# Altium PCB tach key f.PcbDoc
Units mm, origin at the board's own origin, x right, y up, seen from the top; angles counter-clockwise.
Board outline 264.23 x 348.68 mm, 2 copper layers (Top Layer, Bottom Layer); 80 components, 53 nets, 230 pads, 0 vias.
Unrouted connection lines stored in the file: 14.
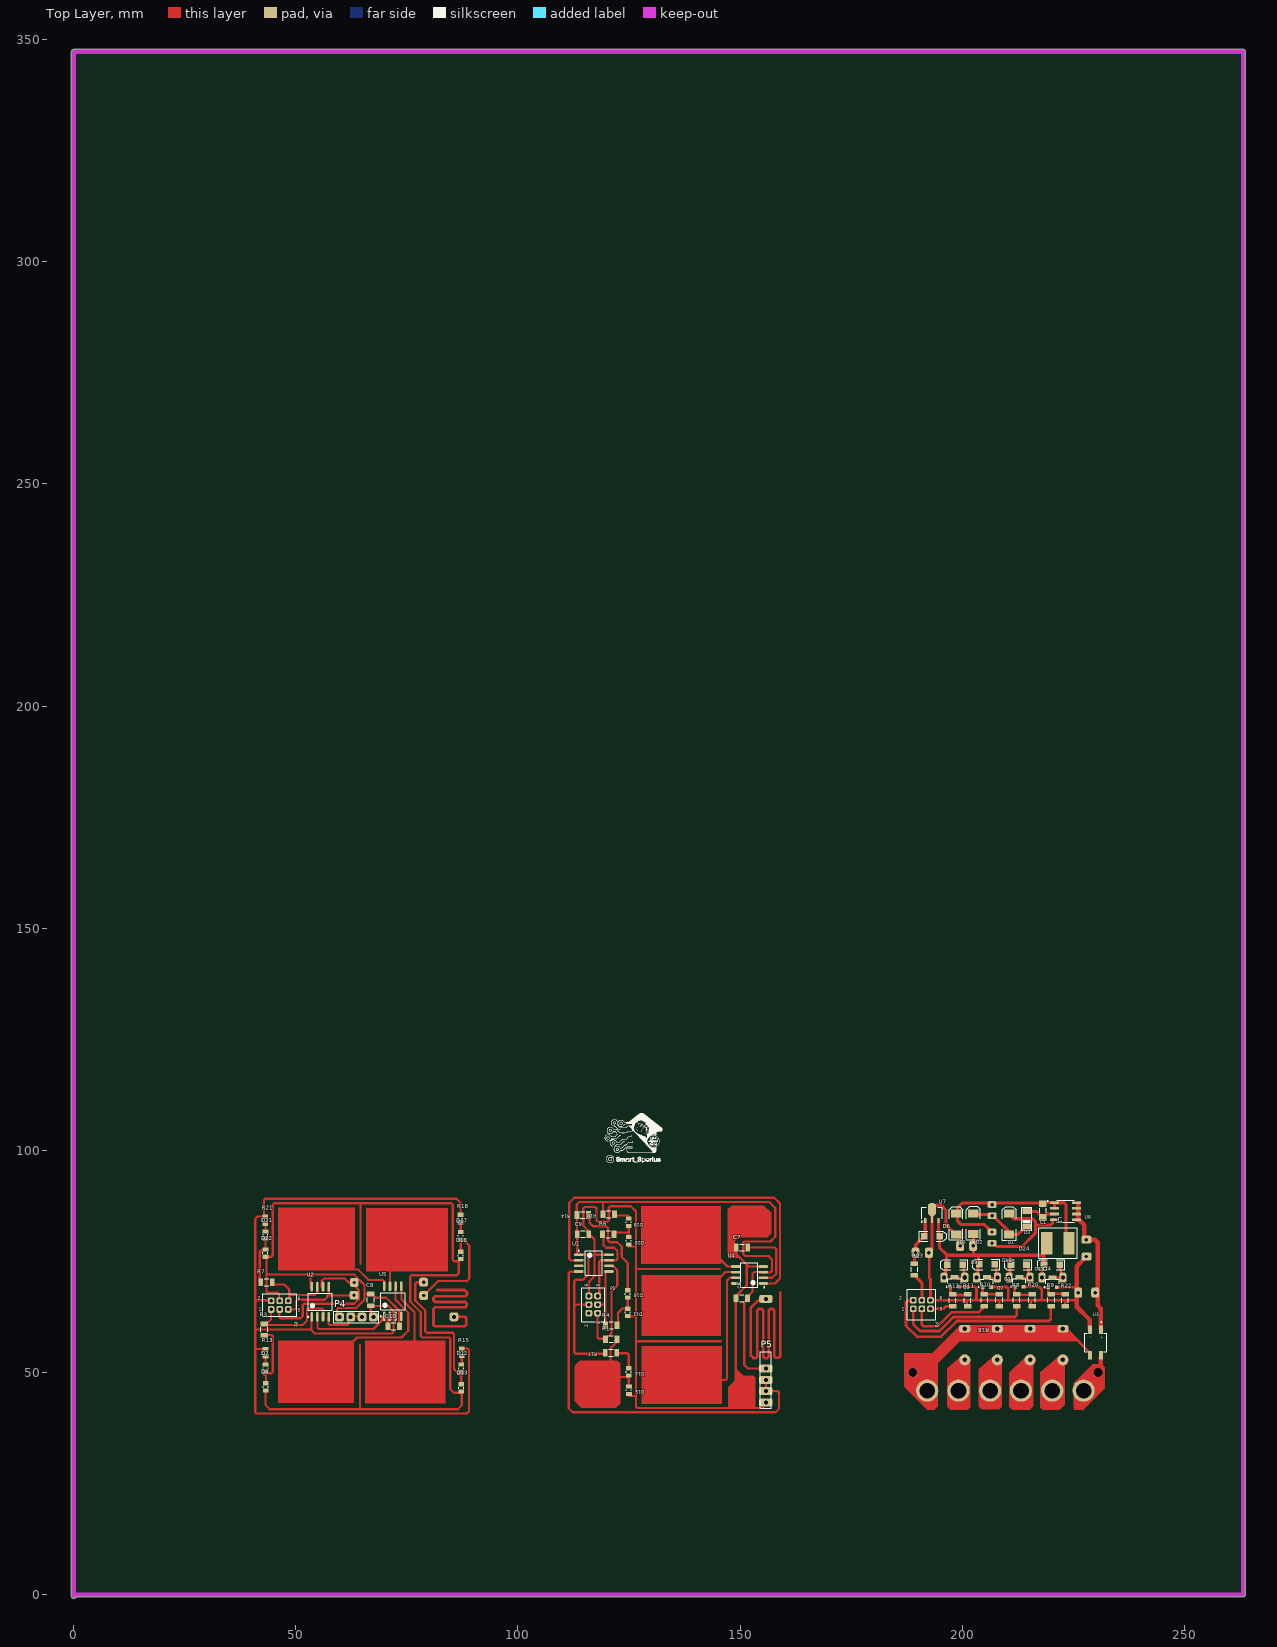
[diagram p0: Top Layer view]
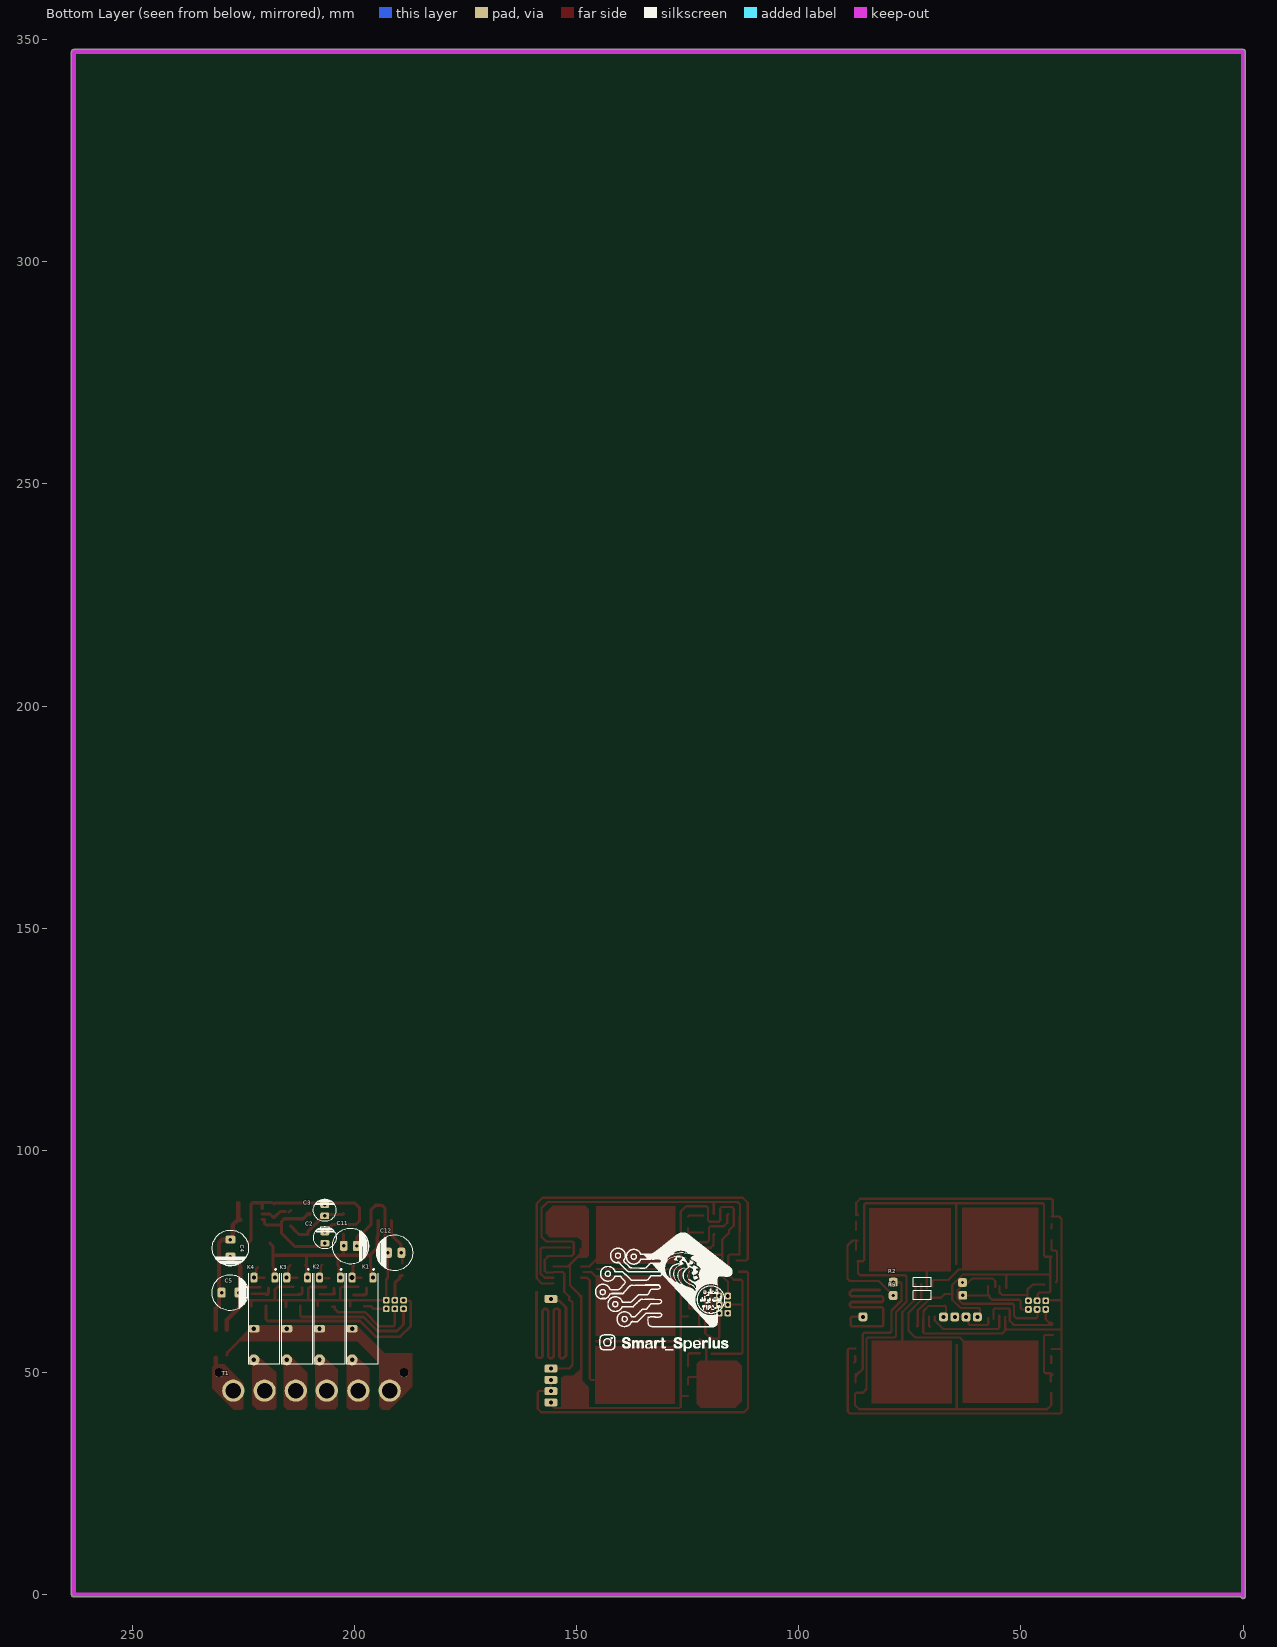
[diagram p1: Bottom Layer view, seen from below]
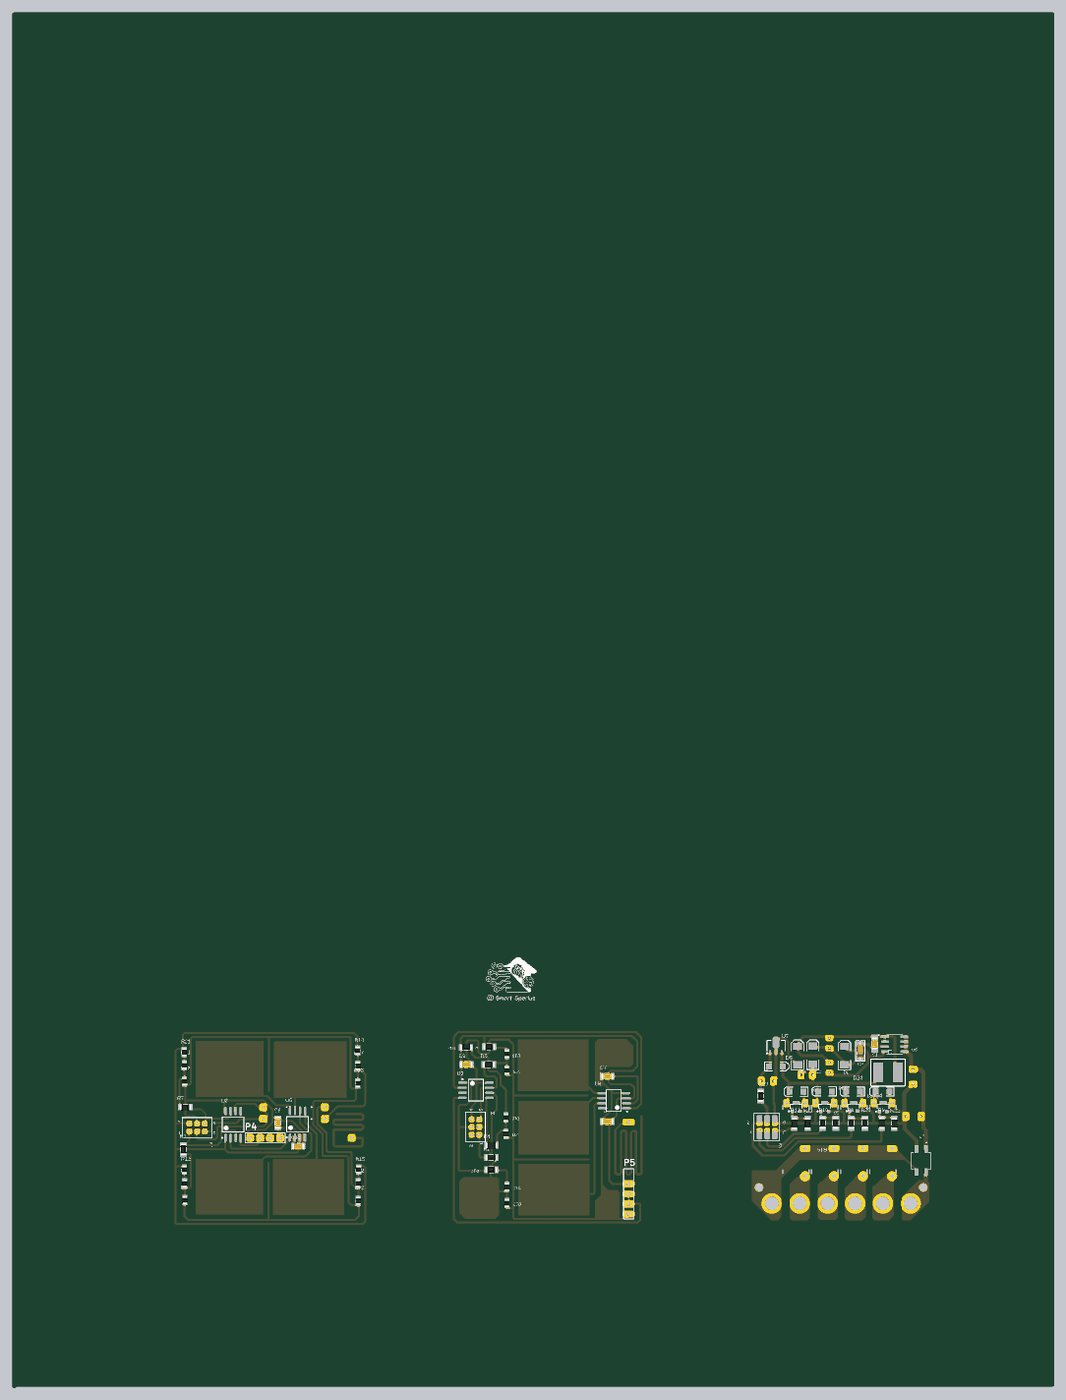
[diagram p2: 3D render of the assembled board from above, using the file's embedded part models]
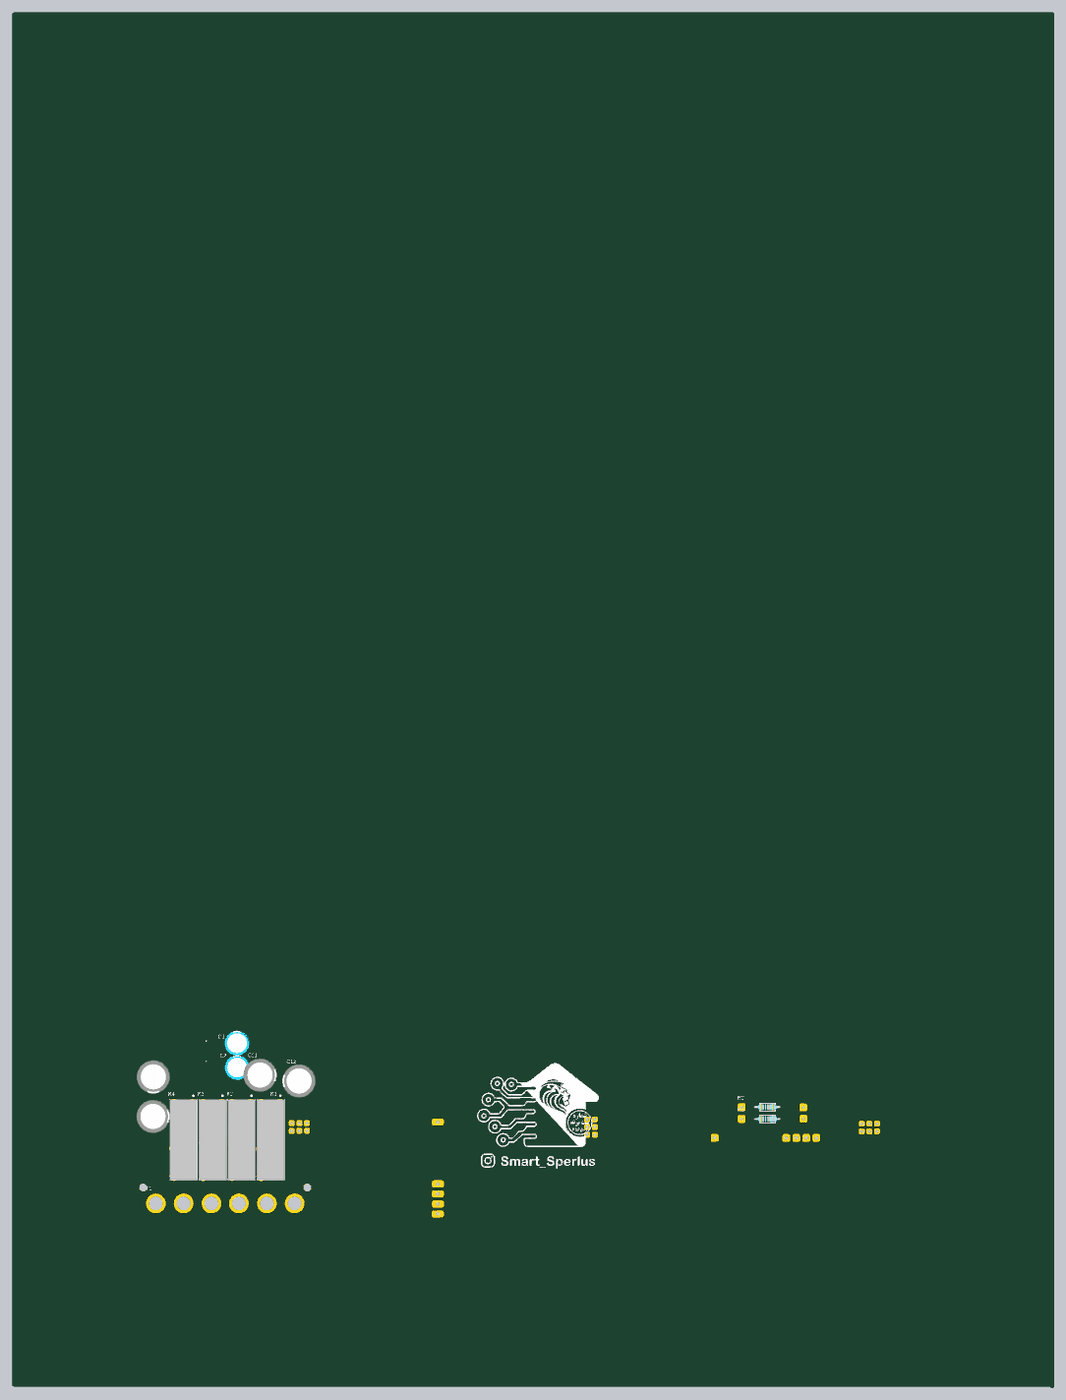
[diagram p3: 3D render of the assembled board from below, using the file's embedded part models]

## Layer stack, top to bottom
Top Solder: solder mask 0.0102, Solder Resist, Dk 3.5
Top Layer: signal copper 0.0356
Dielectric 1: dielectric 0.32, FR-4, Dk 4.8
Bottom Layer: signal copper 0.0356
Bottom Solder: solder mask 0.0102, Solder Resist, Dk 3.5

## Board outline
-0.5,-0.381 -0.5,347.3 cw(c0,347.3) 0,347.8 263.225,347.8 cw(c263.225,347.3) 263.725,347.3 263.725,0 cw(c263.225,0) 263.225,-0.5 0.486,-0.5 cw(c0,-0.381)

## Design rules (kind name [scope] priority, off if disabled: settings)
Clearance Clearance_1 [InPolygon] p1: gap=0.8 ignorepadtopadclearanceinfootprint=FALSE
Clearance [All] p2: gap=0.254 ignorepadtopadclearanceinfootprint=FALSE except(0: Arc-Hole Track-Hole SMDPad-Hole THPad-Hole Via-Hole Fill-Hole Poly-Hole Region-Hole Text-Hole)
PolygonConnect [All] p1: connectstyle=Relief reliefconductorwidth=0.254 reliefentries=4 polygonreliefangle="90 Angle" airgapwidth=0.254
RoomDefinition "tach key f" [InComponentClass('tach key f')] p1: confinementstyle=ConfineIn formatcopy=TRUE lockcomponents=FALSE outline 144.907,-4.953 247.904,-4.953 247.904,23.114 144.907,23.114
RoutingLayers [All] p1: top layer_v5=FALSE bottom layer_v5=TRUE
RoutingVias [All] p1: holewidth=0.711 width=2.5 viastyle="Through Hole" minholewidth=0.711 minwidth=1.27 maxholewidth=0.711 maxwidth=2
SolderMaskExpansion [All] p1: expansion=0.102 istentingtop=FALSE
SupplyNets "Schematic Supply Nets_2" [InNet('GND')] p1: voltage=0.000
SupplyNets "Schematic Supply Nets_1" [InNet('+12v')] p2: voltage=0.000
SupplyNets "Schematic Supply Nets" [InNet('vcc')] p3: voltage=0.000
Width [All] p1: maxlimit=3 minlimit=0.5 preferedwidth=1
29 further rules are at their usual default settings.

## Components (designator, comment, footprint, x,y, rotation, side; value= is the part's Value field where it differs from the comment)
C1 "=Value" "CAP 1206"#1 218.175,86.425 r90 top
C2 "=Value" ELEC-CAP-RAD10-20 206.7,80.35 r270 bottom
C3 "=Value" ELEC-CAP-RAD10-20 206.725,86.525 r270 bottom
C4 "=Value" ELEC-CAP-RAD15-30#1 227.95,78 r90 bottom
C5 "=Value" ELEC-CAP-RAD15-30#1 228.025,67.975 r0 bottom
C6 "=Value" "CAP 1206"#2 150.4,66.7 r180 top
C7 "=Value" "CAP 1206"#2 150.45,78.125 r180 top
C8 "=Value" "CAP 1206"#2 66.85,66.325 r90 top
C9 "=Value" "CAP 1206"#2 114.625,81.15 r0 top
C10 "=Value" "CAP 1206"#2 72,60.391 r0 top
C11 "=Value" ELEC-CAP-RAD15-30#2 200.9,78.45 r0 bottom
C12 "=Value" ELEC-CAP-RAD15-30#3 191,76.95 r180 bottom
D1 "D Schottky" SMB#1 210.575,83.4 r90 top
D2 "D Schottky" SMB#2 202.5,83.425 r90 top
D3 "Zener Diode" DO-35 214.552,87.115 r270 top
D5 "D Schottky" SMB#3 198.625,83.4 r90 top
D6 "D Tunnel1" 3.2X1.6X1.1 193.2,80.65 r0 top
D7 "MODEL" "RES 0805 (2012X06L)" 43.2,50.95 r270 top
D8 "MODEL" "RES 0805 (2012X06L)" 43.25,46.725 r270 top
D9 "D Tunnel1" 3.2X1.6X1.1 198.4,74.25 r180 top
D10 "MODEL" "RES 0805 (2012X06L)" 124.7,67.675 r270 top
D11 "MODEL" "RES 0805 (2012X06L)" 124.7,63.5 r270 top
D12 "MODEL" "RES 0805 (2012X06L)" 87.25,50.95 r270 top
D13 "MODEL" "RES 0805 (2012X06L)" 87.25,46.525 r270 top
D14 "MODEL" "RES 0805 (2012X06L)" 124.95,50.1 r270 top
D15 "MODEL" "RES 0805 (2012X06L)" 124.975,45.975 r270 top
D16 "D Tunnel1" 3.2X1.6X1.1 205.575,74.325 r180 top
D17 "MODEL" "RES 0805 (2012X06L)" 87.125,80.75 r270 top
D18 "MODEL" "RES 0805 (2012X06L)" 87.125,76.35 r270 top
D19 "MODEL" "RES 0805 (2012X06L)" 124.925,83.8 r270 top
D20 "MODEL" "RES 0805 (2012X06L)" 124.925,79.625 r270 top
D21 "MODEL" "RES 0805 (2012X06L)" 43.175,80.925 r270 top
D22 "MODEL" "RES 0805 (2012X06L)" 43.15,76.85 r270 top
D23 "D Tunnel1" 3.2X1.6X1.1 212.725,74.275 r180 top
D24 "D Tunnel1" 3.2X1.6X1.1 220.175,74.275 r180 top
K1 "1-1721081-2" TE_1-1721081-2#1 198.225,62.1 r270 bottom
K2 "1-1721081-2" TE_1-1721081-2#2 205.55,62.1 r270 bottom
K3 "1-1721081-2" TE_1-1721081-2#2 212.925,62.1 r270 bottom
K4 "1-1721081-2" TE_1-1721081-2#2 220.3,62.1 r270 bottom
L1 "1mH" HS1101 221.525,79.1 r0 top
P1 "Header 3X2" HDR2X3 118.214,62.735 r90 top
P2 "Header 3X2" HDR2X3 43.835,63.885 r0 top
P3 "Header 3X2" HDR2X3 188.385,64.01 r0 top
P4 "Header 5" HDR1X5#1 59.82,62.5 r0 top
P5 "Header 5" HDR1X5#2 155.8,43.25 r90 top
Q1 "QNPN" SOT-23B_L 198.275,70.35 r90 top
Q2 "QNPN" SOT-23B_L 205.525,70.325 r90 top
Q3 "QNPN" SOT-23B_L 212.85,70.375 r90 top
Q4 "QNPN" SOT-23B_L 220.325,70.275 r90 top
R1 "10K" "RES 1206 (3216X08L)"#1 121,57.525 r180 top
R2 "10K" Res-(1/4)#1 72.225,70.35 r180 bottom
R3 "10K" "RES 1206 (3216X08L)"#1 42.875,59.625 r90 top
R4 "10K" "RES 1206 (3216X08L)"#1 121,60.625 r180 top
R5 "10K" Res-(1/4)#2 72.2,67.35 r180 bottom
R6 "10K" "RES 1206 (3216X08L)"#1 120.33,81.125 r180 top
R7 "10K" "RES 1206 (3216X08L)"#1 43.4,70.321 r0 top
R8 "10K" "RES 1206 (3216X08L)"#2 212.25,66.275 r270 top
R9 "10K" "RES 1206 (3216X08L)"#2 220.025,66.275 r270 top
R10 "10K" "RES 1206 (3216X08L)"#3 205,66.325 r270 top
R11 "10K" "RES 1206 (3216X08L)"#4 201.2,66.175 r270 top
R12 "10K" "RES 1206 (3216X08L)"#5 197.83,66.2 r270 top
R13 "10K" "RES 0805 (2012X06L)" 43.15,54.475 r90 top
R14 "10K" "RES 1206 (3216X08L)"#1 114.575,85.45 r180 top
R15 "10K" "RES 0805 (2012X06L)" 87.325,54.525 r90 top
R16 "10K" "RES 1206 (3216X08L)"#3 208.325,66.325 r270 top
R17 "10K" "RES 1206 (3216X08L)"#1 120.975,54.45 r180 top
R18 "10K" "RES 0805 (2012X06L)" 87.075,84.675 r90 top
R19 "10K" "RES 1206 (3216X08L)"#1 120.43,85.625 r180 top
R20 "10K" "RES 1206 (3216X08L)"#3 215.725,66.325 r270 top
R21 "10K" "RES 0805 (2012X06L)" 43.1,84.275 r90 top
R22 "10K" "RES 1206 (3216X08L)"#4 223.15,66.175 r270 top
R23 "10K" "RES 1206 (3216X08L)"#1 189.25,73.15 r90 top
T1 "Phoenix terminal" "phoenix terminal 6" 226.166,34.229 r180 bottom
U1 "ATtiny15L-1SC" 8S2_N#1 117.075,74.625 r0 top
U2 "ATtiny15L-1SC" 8S2_N#1 55.49,65.925 r90 top
U3 "MB6S" SOIC245P670X270-4N 230.025,56.75 r270 top
U4 "ATtiny15L-1SC" 8S2_N#2 152.025,71.95 r180 top
U5 "ATtiny15L-1SC" 8S2_N#1 71.825,66.025 r90 top
U6 "HT7A6312" SOIC127P599X175-8N 223.255,86.295 r0 top
U7 "LM1117MP-3.3" SOT89L 193.175,85.9 r90 top

## Footprints (in the part's own frame and the unit in brackets; to place one, negate y for a bottom-side part, rotate by r counter-clockwise, add the part's x,y. Pads: shape width x height; smd on the part's side, far side on the other; paste and mask are expansions set on the pad)
3.2X1.6X1.1 [mm] "SMT LED; 2 Flat Leads"
  rect 1.5x1.5 smd: 1(-1.75,0) 2(1.75,0)
  silkscreen extent -2.9,-1.15 3.27,1.15
8S2_N#1 [mm] "SOP, 8-Leads, Body 5.3x5.3mm, Pitch 1.27mm, IPC Medium Density"
  oval 2.2x0.6 smd: 1(-3.4,1.905) 2(-3.4,0.635) 3(-3.4,-0.635) 4(-3.4,-1.905) 5(3.4,-1.905) 6(3.4,-0.635) 7(3.4,0.635) 8(3.4,1.905)
  silkscreen extent -3.52,-2.75 1.9,2.88, body extent -2.73,-2.75 2.73,2.75, height 2.16
8S2_N#2 [mm] "SOP, 8-Leads, Body 5.3x5.3mm, Pitch 1.27mm, IPC Medium Density"
  oval 2.2x0.6 smd: 1(-3.175,1.905) 2(-3.175,0.635) 3(-3.175,-0.635) 4(-3.175,-1.905) 5(2.975,-1.905) 6(2.975,-0.635) 7(2.975,0.635) 8(2.975,1.905)
  silkscreen extent -3.52,-2.75 1.9,2.88, body extent -2.73,-2.75 2.73,2.75, height 2.16
"CAP 1206"#1 [mm]
  rect 1.5x1.7 smd: 1(-1.524,0) 2(1.524,0)
  silkscreen extent -0.47,-0.75 0.53,0.75, body extent -1.49,-0.77 1.55,0.75, height 0.75
"CAP 1206"#2 [mm]
  rect 1.05x1.7 smd: 1(-1.27,0) 2(1.326,0)
  silkscreen extent -0.47,-0.75 0.53,0.75, body extent -1.49,-0.77 1.55,0.75, height 0.75
DO-35 [mm]
  rect 1.397x2 smd: 1(0.765,-0.027) 2(4.265,-0.027)
  silkscreen extent -0.07,-1.2 5.15,1.15, body extent -0.17,-0.81 5.35,0.84, height 1.81
ELEC-CAP-RAD10-20 [mil]
  rrect50% 60x80 hole 30: 1(-50,0) 2(50,0)
  silkscreen extent -100,-100 100,100, body extent -124,-124 124,124, height 404
ELEC-CAP-RAD15-30#1 [mil]
  rrect50% 70x90 hole 30: 1(-75,0) 2(75,0)
  silkscreen extent -160,-160 160,160, body extent -167,-167 167,167, height 609
ELEC-CAP-RAD15-30#2 [mil]
  rrect50% 70x90 hole 30: 1(-54.13,-0.98) 2(61.02,-1.97)
  silkscreen extent -160,-160 160,160, body extent -167,-167 167,167, height 609
ELEC-CAP-RAD15-30#3 [mil]
  rrect50% 70x90 hole 30: 1(-59.06,0) 2(60.04,0)
  silkscreen extent -160,-160 160,160, body extent -167,-167 167,167, height 609
HDR1X5#1 [mm] "Connector; Header; 5 Position"
  rrect50% 2x2 hole 0.9: 1(0,0) 2(2.54,0) 3(5.08,0) 4(7.62,0) 5(25.755,0.025)
  silkscreen extent -1.27,-1.27 8.89,1.27
HDR1X5#2 [mm] "Connector; Header; 5 Position"
  rrect50% 1.8x3 hole 0.9: 1(0,0) 2(2.54,0) 3(5.08,0) 4(7.62,0) 5(23.3,0)
  silkscreen extent -1.27,-1.27 11.43,1.27
HDR2X3 [mm] "Connector; Header; 3x2 Position"
  rrect50% 1.5x1.5 hole 0.8: 1(0.6,0.3) 2(0.6,2.24) 3(2.54,0.3) 4(2.54,2.24) 5(4.48,0.3) 6(4.48,2.24)
  silkscreen extent -1.27,-1.27 6.35,3.81
HS1101 [mm] "HUMIDITY SENSOR"
  rect 2.5x5 smd: 1(2.5,0) 2(-2.5,0)
"phoenix terminal 6" [mm] "6 terminals"
  round 5 hole 3.5: 1(-1.143,11.684) 2(5.897,11.684) 3(12.937,11.684) 4(19.897,11.684) 5(26.997,11.684) 6(34.057,11.684)
"RES 0805 (2012X06L)" [mm] "Chip Resistor, 2-Leads, Body 2.0x1.3mm, IPC High Density _ (0.100 W)"
  rect 0.95x1.3 smd: 1(-0.838,0) 2(0.812,0)
  silkscreen extent -0.16,-0.55 0.14,0.55, body extent -1.03,-0.63 1,0.64, height 0.6
"RES 1206 (3216X08L)"#1 [mm] "Chip Resistor, 2-Leads, Body 3.2x1.6mm, IPC High Density _ (0.125 W)"
  rect 1.05x1.7 smd: 1(-1.295,0) 2(1.301,0)
  silkscreen extent -0.5,-0.75 0.5,0.75, body extent -1.52,-0.76 1.53,0.76, height 0.6
"RES 1206 (3216X08L)"#2 [mm] "Chip Resistor, 2-Leads, Body 3.2x1.6mm, IPC High Density _ (0.125 W)"
  rect 1.05x1.7 smd: 1(-1.325,0) 2(1.401,0)
  silkscreen extent -0.5,-0.75 0.5,0.75, body extent -1.52,-0.76 1.53,0.76, height 0.6
"RES 1206 (3216X08L)"#3 [mm] "Chip Resistor, 2-Leads, Body 3.2x1.6mm, IPC High Density _ (0.125 W)"
  rect 1.05x1.7 smd: 1(-1.275,0) 2(1.451,0)
  silkscreen extent -0.5,-0.75 0.5,0.75, body extent -1.52,-0.76 1.53,0.76, height 0.6
"RES 1206 (3216X08L)"#4 [mm] "Chip Resistor, 2-Leads, Body 3.2x1.6mm, IPC High Density _ (0.125 W)"
  rect 1.05x1.7 smd: 1(-1.425,0) 2(1.301,0)
  silkscreen extent -0.5,-0.75 0.5,0.75, body extent -1.52,-0.76 1.53,0.76, height 0.6
"RES 1206 (3216X08L)"#5 [mm] "Chip Resistor, 2-Leads, Body 3.2x1.6mm, IPC High Density _ (0.125 W)"
  rect 1.05x1.7 smd: 1(-1.4,0) 2(1.326,0)
  silkscreen extent -0.5,-0.75 0.5,0.75, body extent -1.52,-0.76 1.53,0.76, height 0.6
Res-(1/4)#1 [mm]
  rrect50% 2x2 hole 0.762: 1(-6.525,-0.025) 2(9.075,-0.1)
  silkscreen extent -2.03,-1.02 2.03,1.02, body extent -3.43,-0.92 3.43,0.91, height 2.92
Res-(1/4)#2 [mm]
  rrect50% 2x2 hole 0.762: 1(-6.575,-0.025) 2(9.1,0.025)
  silkscreen extent -2.03,-1.02 2.03,1.02, body extent -3.43,-0.92 3.43,0.91, height 2.92
SMB#1 [mm] "DO-214-AA/SMB; 2 C-Bend Leads; Body 5.3 x 3.6 mm, inc. leads (LxW)"
  rect 1.8x2.3 smd: 1(-2.35,0.025) 2(2.375,0)
  silkscreen extent -3.6,-1.55 3.9,1.55
SMB#2 [mm] "DO-214-AA/SMB; 2 C-Bend Leads; Body 5.3 x 3.6 mm, inc. leads (LxW)"
  rect 1.8x2.3 smd: 1(-2.254,0) 2(2.371,0.025)
  silkscreen extent -3.58,-1.55 3.95,1.55
SMB#3 [mm] "DO-214-AA/SMB; 2 C-Bend Leads; Body 5.3 x 3.6 mm, inc. leads (LxW)"
  rect 1.8x2.3 smd: 1(-2.325,-0.05) 2(2.375,-0.025)
  silkscreen extent -3.57,-1.55 3.95,1.55
SOIC127P599X175-8N [mm]
  rrect25% 1.97x0.6 smd: 1(-2.47,1.905) 2(-2.47,0.635) 3(-2.47,-0.635) 4(-2.47,-1.905) 5(2.47,-1.905) 6(2.47,-0.635) 7(2.47,0.635) 8(2.47,1.905)
  silkscreen extent -4.14,-2.52 1.95,2.52
SOIC245P670X270-4N [mm]
  rrect23% 1.91x0.91 smd: 1(-2.9,1.225) 2(-2.9,-1.225) 3(2.9,-1.225) 4(2.9,1.225)
  silkscreen extent -4.68,-2.48 2.1,2.48
SOT89L [mm] "SOT89, 3-Leads, Body 4.5x2.4 mm, Pitch 1.5mm, Lead Span 4.1mm, IPC High Density"
  rect 1.2x0.5 smd: 1(-1.7,1.5) 3(-1.7,-1.5)
  rect 1.6x0.5 smd: 2(-1.5,0)
  oct 3x1.8 smd: 2(0.8,0)
  silkscreen extent -2.07,-2.3 1.3,2.42, body extent -1.3,-2.3 1.3,2.3, height 1.6
SOT-23B_L [mm] "SOT23, 3-Leads, Body 2.9x1.3mm, Pitch 0.95mm, Lead Span 2.4mm, IPC High Density"
  rect 0.85x0.8 smd: 1(-1.075,0.95) 2(-1.075,-0.95)
  rect 1x1.8 smd: 3(1.075,0)
  silkscreen extent -1.2,-1.5 0.7,1.92, body extent -0.7,-1.5 0.7,1.5, height 1.14
TE_1-1721081-2#1 [mm]
  rrect50% 2.2x1.6 hole 0.9 mask+0.102: 1(-9.25,2.35)
  rrect50% 2.2x1.6 hole 1.1 mask+0.102: 2(-9.25,-2.35)
  rrect50% 1.6x2.5 hole 1 mask+0.102: 3(2.25,-2.35)
  round 2.5 hole 1 mask+0.102: 4(9.25,-2.35)
  silkscreen extent -11.24,-3.5 10.2,3.5, body extent -10.2,-3.5 10.2,3.5, height 14.5
TE_1-1721081-2#2 [mm]
  rrect50% 2.2x1.6 hole 0.9 mask+0.102: 1(-9.25,2.35) 2(-9.25,-2.35)
  rrect50% 1.6x2.5 hole 1 mask+0.102: 3(2.25,-2.35)
  round 2.5 hole 1 mask+0.102: 4(9.25,-2.35)
  silkscreen extent -11.24,-3.5 10.2,3.5, body extent -10.2,-3.5 10.2,3.5, height 14.5

## Part data
C1 C6 C7 C8 C9 C10: library part Capacitor, "Capacitor"
C2 C3 C4 C5 C11 C12: library part "Capacitor Electrolytic", "Electrolytic Capacitor"
D1 D2 D5: "Schottky Diode", Code_JEDEC=DO-214-AA, LatestRevisionDate=17-Jul-2002, LatestRevisionNote="Re-released for DXP Platform.", PackageDescription="DO-214-AA/SMB; 2 C-Bend Leads; Body 5.3 x 3.6 mm, inc. leads (LxW)", PackageReference=SMB, Published=8-Jun-2000, Publisher="Altium Limited", Simulation ModelName=SKYDIODE, Simulation PortMap=(1:1),(2:2)
D6 D9 D16 D23 D24: "Tunnel Diode - RLC Model", LatestRevisionDate=17-Jul-2002, LatestRevisionNote="Re-released for DXP Platform.", PackageDescription="SM LED; 2 Flat Leads", PackageReference=3.2X1.6X1.1, PackageVersion=Feb-2002, Published=8-Jun-2000, Publisher="Altium Limited", Simulation ModelName=DTUNNEL1, Simulation PortMap=(1:1),(2:2)
D7 D8 D10 D11 D12 D13 D14 D15 D17 D18 D19 D20 D21 D22: library part "LED 5mm", "Typical LED", COLOR=RED
K1 K2 K3 K4: "General Purpose Relay SPST-NO (1 Form A) 12VDC Coil Through Hole", Package=None, Check_prices=https://www.snapeda.com/parts/1-1721081-2/TE+Connectivity+Potter+%2526+Brumfield+Relays/view-part/?ref=eda, MF="TE Connectivity", MP=1-1721081-2, SnapEDA_Link=https://www.snapeda.com/parts/1-1721081-2/TE+Connectivity+Potter+%2526+Brumfield+Relays/view-part/?ref=snap
L1: library part Inductor, "Inductor", Code_IEC=1005, Code_JEITA=0402, LatestRevisionDate=17-Jul-2002, LatestRevisionNote="Re-released for DXP Platform.", PackageReference=0402-A, Published=8-Jun-2000, Publisher="Altium Limited", Simulation ModelName=INDUCTOR, Simulation PortMap=(1:1),(2:2)
P1 P2 P3: "Header, 3-Pin, Dual row", LatestRevisionDate=17-Jul-2002, LatestRevisionNote="Re-released for DXP Platform.", Publisher="Altium Limited"
P4 P5: "Header, 5-Pin", LatestRevisionDate=17-Jul-2002, LatestRevisionNote="Re-released for DXP Platform.", Publisher="Altium Limited"
Q1 Q2 Q3 Q4: "NPN Bipolar Transistor", LatestRevisionDate=29-May-2009, LatestRevisionNote="IPC-7351 Footprint Added.", PackageDescription="3-Pin SOT-23 Package 0.95 mm Pitch, 2.4 mm Lead Span", PackageReference=SOT-23B, PackageVersion=Aug-1999, Published=8-Jun-2000, Publisher="Altium Limited", Simulation ModelName=QNPN, Simulation PortMap=(1:1),(2:2),(3:3)
R1 R2 R3 R4 R5 R6 R7 R8 R9 R10 R11 R12 R13 R14 R15 R16 R17 R18 R19 R20 R21 R22 R23: library part Resistor, "Resistor", Power="1/4 W", Tolerance=5%, Simulation ModelName="Model Name", Simulation PortMap=(1:1),(2:2)
T1: library part "Phoenix terminal 6", "Terminal 6 Pin", ComponentLinkURL=www.picpars.com, Designer="Seyed Mohsen Ghasemain", E-mail=picpars@gmail.com
U1 U2 U4 U5: "8-Bit AVR Microcontroller with 1K Byte of Flash Memory", Supplier Part Number 1=ATTINY15L-1SC-ND, ComponentLink1Description=Datasheet, ComponentLink1URL=http://www.atmel.com/dyn/resources/prod_documents/doc1187.pdf, ComponentLink2Description="Atmel.com Home", ComponentLink2URL=http://www.atmel.com, DatasheetVersion=1187E-AVR-06/02, LatestRevisionDate=16-Oct-2006, LatestRevisionNote="IPC-7351 Footprint Added.", PackageDescription="8-Lead, 0.208\" Body, Plastic Small Outline Package (EIAJ)", PackageReference=8S2, PackageVersion="revF, Apr-2008", Published=17-Sep-2003, Publisher="Altium Limited", Supplier 1=Digi-Key, Supplier 2=Mouser, Supplier Part Number 2=556-ATTINY15L1SC
U3: "Bridge Rectifier Single Phase Standard 600V Surface Mount 4-SOIC", Package="BESOP-4 Surge Components", Digi-Key_Part_Number=MB6SCT-ND, Digi-Key_Purchase_URL=https://www.digikey.com.tr/product-detail/en/on-semiconductor/MB6S/MB6SCT-ND/965654?utm_source=snapeda&utm_medium=aggregator&utm_campaign=symbol, MF="ON Semiconductor", MP=MB6S, SnapEDA_Link=https://www.snapeda.com/parts/MB6S/ON%20Semiconductor/view-part/2774209/?ref=snap
U6: library part Component_1
U7: "800mA Low-Dropout Linear Regulator", DigiKeyPartNumber=LM1117MP-3.3CT-ND, Manufacturer="National Semiconductor", PackageTopMarking=XYTT*N05A, PowerWise=N, Code_IPC=SOT223-4, Code_JEDEC=TO-261-AA, ComponentLink1Description="LM1117 Datasheet", ComponentLink1URL=http://www.national.com/ds/LM/LM1117.pdf, ComponentLink2Description="LM1117 Web Page", ComponentLink2URL=http://www.national.com/pf/LM/LM1117.html, ComponentLink3Description="MP04A Package Page", ComponentLink3URL=http://www.national.com/packaging/folders/mp04a.html, CompType="LDO IC", DatasheetVersion=Apr-2006, PackageDescription="Molded SOT-223, 6.50 x 3.56 x 1.6mm Body, 4 Lead, 2.3mm Pitch", PackageReference=MP04A, PackageVersion="revB, Apr-2003", PartNumber=LM1117MP-3.3, PinCount=4, Published=4-Dec-2008, Publisher="Altium Limited", RoHS=O
D3: MODEL=1N

## Free pads (board coordinates)
  round 2 hole 2: 156(188.875,49.95) 157(230.525,49.95)

## Nets (pads, with @x,y where several pads share a name; then routed paths per layer and width w, separated by ;. In a path a pad name is that pad's centre, name@x,y a point inside that pad or via, vN(x,y) a via of type N, cw(c..) or ccw(c..) an arc to the next point about the centre after c; other vN are vias at no path point)
+12v: C11.2 D2.1 D6.2 D9.2 D16.2 D23.2 D24.2 K1.1 K2.1 K3.1 K4.1 L1.2 U7.3 | length 59.1
  Top Layer w0.7: U7.3 194.675,80.925 D6.2 ; D6.2@194.9,80.65 194.9,78.075 196.6,76.375 203.7,76.375 ; K1.1 196.3,71.775 196.3,73.725 D9.2@196.675,74.1 ; D9.2@196.425,74.1 196.425,76.55 ; C11.2 202.525,78.425 202.525,76.425 ; D2.1 202.525,81.146 C11.2@202.525,78.9 ; K2.1 203.55,71.7 203.55,73.875 203.85,74.175 203.7,74.325 203.7,76.375 ; K3.1 210.775,71.55 210.775,73.9 211,74.125 210.825,74.3 210.825,76.375 ; K4.1 218.112,71.512 218.112,73.512 218.275,73.675 218.35,73.75 218.35,76.375 ; L1.2 218.35,78.425 218.35,76.375 ; 203.7,76.375 210.825,76.375 ; 210.825,76.375 218.35,76.375
data: U1.2 U4.1 | length 84.9
  Top Layer w0.5: U1.2@114.025,75.235 111.818,75.235 111.525,75.528 111.525,88.2 112.65,89.325 157.7,89.325 158.983,88.042 158.983,71.183 157.845,70.045 U4.1
data2: U2.2 U5.1 | length 19
  Top Layer w0.5: U2.2@54.9,62.776 54.874,62.75 54.874,61.635 54.9,61.609 54.9,60.093 55.193,59.8 67.5,59.8 69.401,61.701 69.401,62.606 69.42,62.625
faz: K1.3 K2.3 K3.3 K4.3 T1.6 U3.3 | length 48.8
  Top Layer w0.6: K4.3 223.088,59.412 223.763,59.412 228.645,54.53 228.645,54.005 U3.3
  Top Layer w1.6: T1.6 192.109,52.034 199.925,59.85 K1.3 K2.3 K3.3 K4.3
GND: C4.1 C5.1 C6.2 C7.2 C8.2 C9.2 C10.2 C11.1 C12.1 D5.1 D8.2 D11.2 D13.2 D15.2 D18.2 D20.2 D22.2 P1.4 P2.4 P3.6 P4.1 P5.1 Q1.2 Q2.2 Q3.2 Q4.2 R11.2 R16.2 R20.2 R22.2 U1.8 U2.8 U3.2 U4.4 U5.4 U7.2 | length 579.4
  Top Layer w0.5: 43.25,45.424 43.2,45.374 43.2,42.65 44.15,41.7 64.45,41.7 ; 43.4,72.025 43.4,75.813 43.175,76.038 D22.2 43.368,76.038 43.4,76.038 44.532,76.038 44.825,76.331 44.825,87.807 45.118,88.1 64.55,88.1 ; P2.4@46.225,66.148 46.225,67.682 45.932,67.975 43.693,67.975 43.4,68.268 43.4,71.993 43.368,72.025 53.3,72.025 ; U2.8@53.3,69.006 53.3,72.025 ; P4.1@59.245,62.6 59.245,64.207 59.538,64.5 63.568,64.5 65.45,66.382 65.45,67.657 ; 64.45,56.2 64.45,41.7 ; 64.55,74.425 64.55,88.1 ; C8.2@66.844,67.657 65.45,67.657 ; C8.2 67.175,67.651 68.001,66.825 70.325,66.825 73.211,63.939 73.211,62.644 73.23,62.625 73.23,60.487 C10.2 ; 86.675,74.774 86.675,72.35 86.225,71.9 76.068,71.9 75.775,71.607 75.775,65.925 78.125,63.575 78.125,58.193 78.418,57.9 84.457,57.9 84.75,57.607 84.75,46.275 85.572,45.453 87.021,45.453 87.25,45.224 ; 86.8,75.05 85.593,75.05 85.3,75.343 85.3,87.807 85.007,88.1 64.55,88.1 ; 87.35,45.224 87.35,42.625 86.425,41.7 64.45,41.7 ; C9.2 115.726,81.375 115.726,81.999 114.675,83.05 114.675,86.924 115.026,87.275 117.324,87.275 117.675,86.924 117.675,84.276 118.026,83.925 120.095,83.925 120.446,84.276 120.446,87.07 120.801,87.425 125.4,87.425 126.57,86.255 126.57,78.324 ; 115.974,67.215 115.974,70.424 117.225,71.675 117.225,76.495 ; C9.2@115.976,81.175 117.225,79.926 117.225,76.495 ; U1.8@120.25,76.495 117.225,76.495 ; 124.925,78.324 126.57,78.324 ; 124.975,44.674 126.307,44.674 126.57,44.937 ; D11.2@124.984,62.6 126.57,62.6 ; 145.4,73.275 126.57,73.275 ; 145.625,57.025 126.57,57.025 ; C7.2@149.124,77.775 149.124,76.676 151.5,74.3 ; U4.4 151.945,73.855 151.5,74.3 ; P5.1@155.975,43.518 155.35,42.893 155.35,42.351 154.999,42 149,42 ; 53.3,72.025 63.125,72.025 65.45,69.7 65.45,67.657 ; 126.57,44.937 126.57,57.025 ; 126.57,44.937 126.6,44.967 126.6,42.293 126.893,42 149,42 ; 126.57,57.025 126.57,62.174 126.57,62.6 ; 126.57,62.6 126.57,73.275 ; 126.57,73.275 126.57,78.324 ; 149,42 149,67.15 149.199,67.15 149.299,67.25 149.299,67.449 151.5,69.65 151.5,74.3
  Top Layer w0.6: C12.1 192.5,77.047 193.078,77.625 C12.1@193.175,77.625 ; C12.1@192.55,76.95 192.55,71.275 192.865,70.96 P3.6 ; P3.6@192.89,66.275 201,66.275 ; Q1.2 202.849,69.275 203.2,68.924 203.2,66.275 ; R11.2@201,64.875 201,66.275 ; Q2.2 210.049,69.25 210.4,68.899 210.4,66.275 ; R16.2@208.325,65.024 208.325,66.275 ; Q3.2 217.225,69.3 217.9,68.625 217.9,66.275 ; R20.2@215.45,64.816 215.45,66.275 ; Q4.2 225.75,69.2 ; R22.2@223.225,64.953 223.225,66.275 ; 225.75,66.275 223.225,66.275 ; C5.1@225.75,69 226.12,69 C5.1 ; 201,66.275 203.2,66.275 ; 203.2,66.275 208.325,66.275 ; 208.325,66.275 210.4,66.275 ; 210.4,66.275 215.45,66.275 ; 215.45,66.275 217.9,66.275 ; 217.9,66.275 223.225,66.275
  Top Layer w0.7: C12.1@193.175,77.625 193.175,84.4 193.175,86.7 193.175,87.026 193.775,87.626 194.102,87.626 194.126,87.65 195.25,87.65 196.325,86.575 196.325,83.225 197.875,81.675 197.875,81.625 198.425,81.075 D5.1 198.925,81.075 199.475,80.525 C11.1@199.475,78.177
  Top Layer w1: C4.1 227.696,76.095 227.307,75.706 227.307,75.452 225.75,73.895 225.75,69 225.75,67.975 225.75,66.325 225.75,66.125 225.781,66.094 225.781,64.794 228.755,61.82 228.755,59.695 U3.2
NetC1_1: C1.1 D3.1 U6.3 | length 6.7
  Top Layer w0.6: D3.1@214.407,86.467 D3.1@214.786,86.089
  Top Layer w0.7: 215.53,86.225 216.751,86.225 218.075,84.901 218.275,84.901 219.034,85.66 U6.3
NetC1_2: C1.2 C2.1 C3.1 D5.2 L1.1 U6.1 U6.2 | length 46.8
  Top Layer w0.7: C2.1@206.463,81.795 206.288,81.795 206.053,82.03 206.053,82.205 204.908,83.35 199.675,83.35 198.9,84.125 198.9,86.35 198.932,86.382 198.932,87.107 199.975,88.15 206.77,88.15 207.175,87.745 207.58,88.15 217.974,88.15 C1.2 ; C1.2@218.65,88.225 220.785,88.225 220.81,88.2 222.94,88.2 223.35,87.79 223.35,79.775 L1.1 ; U6.2 U6.1
NetC2_2: C2.2 D1.2 U6.4 | length 27.4
  Top Layer w0.7: C2.2@206.7,79.255 206.937,79.255 207.347,78.845 207.347,78.779 207.776,78.35 213.475,78.35 216.465,81.34 216.465,83.2 ; D1.2 209.913,85.775 210.028,85.513 210.45,85.7 211.55,84.6 215.825,84.6 216.429,83.996 ; 216.465,83.96 216.465,83.2 ; U6.4 220.31,84.39 220.31,83.551 219.958,83.2 216.465,83.2
NetC3_2: C3.2 D1.1 D2.2 D3.2 | length 15.1
  Top Layer w0.7: D2.2 202.746,85.525 206.455,85.525 C3.2 206.962,85.255 207.391,84.826 207.391,84.809 210.55,81.65 D1.1 212.505,81.05 213.825,82.37 213.825,82.451 214.341,82.967 D3.2@214.422,82.967
NetC4_2: C4.2 C5.2 U3.1 U6.5 U6.6 U6.7 U6.8 | length 32
  Top Layer w1: U6.5 226.26,84.39 227.464,83.186 227.464,80.294 227.853,79.904 229.842,79.904 230.525,79.222 230.525,65.075 231.205,64.395 231.205,59.695 U3.1 ; 226.145,84.707 226.145,85.66 U6.8@226.145,88.15
NetC7_1: C7.1 U4.2 | length 15.6
  Top Layer w0.5: C7.1@151.546,78.125 157.778,78.125 158.129,77.774 158.129,72.244 157.2,71.315 U4.2
NetC10_1: C10.1 U5.2 | length 2.4
  Top Layer w0.5: C10.1@70.479,60.3 70.671,60.492 70.671,62.606 70.69,62.625
NetD7_1: D7.1 R13.1 | length 1.5
  Top Layer w0.5: D7.1@43.175,52.147 R13.1@43.175,53.637
NetD9_1: D9.1 K1.2 Q1.3 | length 4.8
  Top Layer w0.6: Q1.3@198.465,71.305 K1.2@200.35,71.305 ; D9.1@200.175,74.1 200.35,73.925 200.35,71.575 K1.2
NetD10_1: D10.1 R14.1 | length 23.2
  Top Layer w0.5: R14.1@115.82,85.7 116.095,85.425 116.095,83.68 116.875,82.9 119.899,82.9 120.25,82.549 120.25,79.7 120.625,79.325 122.375,79.325 123.35,78.35 123.35,76 124.7,74.65 D10.1@124.7,68.951
NetD12_1: D12.1 R15.1 | length 1.5
  Top Layer w0.5: R15.1 87.325,52.466 D12.1@87.545,52.245
NetD14_1: D14.1 R17.1 | length 5.4
  Top Layer w0.5: R17.1@122.295,54.325 124.657,54.325 124.95,54.032 D14.1@124.95,51.395
NetD16_1: D16.1 K2.2 Q2.3 | length 5.3
  Top Layer w0.6: Q2.3@205.713,71.237 207.787,71.237 K2.2 207.65,71.6 207.65,73.875 D16.1@207.35,74.175
NetD17_1: D17.1 R18.1 | length 1.9
  Top Layer w0.5: D17.1@87.125,82.045 R18.1@87.125,83.937
NetD19_1: D19.1 R19.1 | length 3.5
  Top Layer w0.5: R19.1@121.509,85.32 124.7,85.32 D19.1@124.925,85.095
NetD21_1: D21.1 R21.1 | length 1
  Top Layer w0.5: 43.15,82.395 R21.1@43.15,83.425
NetD23_1: D23.1 K3.2 Q3.3 | length 5.2
  Top Layer w0.6: Q3.3@212.95,71.325 212.963,71.338 215.263,71.338 K3.2 ; D23.1@214.5,74.125 214.925,73.7 214.925,71.911 K3.2@215.275,71.561
NetD24_1: D24.1 K4.2 Q4.3 | length 5
  Top Layer w0.6: Q4.3 K4.2 222.65,71.668 222.174,72.143 222.174,73.276 D24.1@221.775,73.675
NetP3_1: P3.1 R12.2 | length 30.9
  Top Layer w0.6: P3.1 188.985,60.84 190.5,59.325 194.85,59.325 198.025,62.5 211.899,62.5 212.25,62.851 212.25,64.974
NetP3_2: P3.2 R10.2 | length 45.5
  Top Layer w0.6: P3.2 188.915,66.18 187.701,66.18 187.35,65.829 187.35,60.475 189.775,58.05 195.275,58.05 198.8,61.575 219.574,61.575 219.925,61.926 219.925,65.047
NetP3_3: P3.3 R9.2 | length 19.9
  Top Layer w0.6: P3.3 190.925,60.751 191.276,60.4 194.475,60.4 197.65,63.575 203.772,63.575 204.45,64.253 204.45,64.799 204.975,64.799
NetP3_5: P3.5 R8.2 | length 4.7
  Top Layer w0.6: P3.5@193.365,64.31 195.76,64.31 196.349,64.899 197.83,64.899
nol: T1.1 U3.4 | length 9.8
  Top Layer w1: T1.1 227.914,46.518 229.093,46.518 230.525,47.95 230.525,50.092 231.225,50.792 231.225,53.07 231.23,53.075 U3.4@231.23,53.37
o1: P1.6 R6.2 U1.7 | length 20
  Top Layer w0.5: 118.1,67.4 118.3,67.6 118.3,74.957 118.593,75.25 119.354,75.25 119.36,75.244 U1.7@120.25,75.244 ; R6.2 119.225,80.929 119.225,78.7 119.85,78.075 121.675,78.075 122.375,77.375 122.375,75.525 122.075,75.225 121.381,75.225 121.365,75.241 120.266,75.241 U1.7@120.25,75.225
o2: P1.5 R4.2 U1.5 | length 14.6
  Top Layer w0.5: 117.914,65.275 119.699,65.275 ; R4.2 119.699,65.275 ; U1.5 119.746,72.72 119.699,72.674 119.699,65.275
o3: P1.3 R1.2 U1.6 | length 26.7
  Top Layer w0.5: 117.925,63.639 117.925,57.875 118.218,57.582 119.642,57.582 R1.2 ; R1.2@119.699,57.543 119.699,57.85 119.974,58.125 120.325,58.125 121.05,58.85 121.05,68.3 122.35,69.6 122.35,73.075 121.502,73.923 121.153,73.923 121.14,73.936 120.565,73.936 U1.6@120.554,73.925
o11: P2.6 R7.2 U2.7 | length 14.8
  Top Layer w0.5: R7.2@44.775,69.8 47.375,69.8 48.515,68.66 48.515,67.425 ; P2.6 48.515,66.325 48.515,67.425 ; U2.7@54.825,69.393 54.836,69.382 54.836,68.435 54.825,68.424 54.825,68.025 54.225,67.425 48.515,67.425
o12: P2.5 R5.2 U2.5 | length 18.4
  Top Layer w0.5: P2.5 49.757,64.185 50.05,64.478 50.05,66.057 50.343,66.35 56.498,66.35 57.075,66.927 57.075,67.332 57.4,67.332 ; U2.5@57.4,69.453 57.4,67.332 ; 62.075,67.3 62.043,67.332 57.4,67.332
o13: P2.3 R2.2 U2.6 | length 35
  Top Layer w0.5: P2.3@46.275,64.244 46.275,62.518 46.568,62.225 51.025,62.225 51.55,62.75 51.55,65.157 51.843,65.45 63.15,65.45 64.225,66.525 64.225,68.5 R2.2@62.921,69.804 ; 55.785,69.3 55.797,69.312 55.797,70.572 56.35,71.125 61.04,71.125 61.99,70.175 62.125,70.175
o14: P2.1 R3.2 U2.3 | length 22.9
  Top Layer w0.5: P2.1 44.435,61.984 43.651,61.201 43.15,61.201 R3.2 43.126,60.675 51.55,60.675 52.5,61.625 52.5,64.132 52.793,64.425 55.907,64.425 56.2,64.132 U2.3@56.2,62.01
o21: D19.2 D20.1 R6.1 | length 4.9
  Top Layer w0.5: R6.1@121.577,81.525 124.925,81.525 ; D20.1@124.925,80.92 124.925,81.525 ; 124.925,82.499 124.925,81.525
o22: D10.2 D11.1 R4.1 | length 7.9
  Top Layer w0.5: R4.1 122.5,60.83 122.5,63.4 123.528,64.428 124.7,64.428 D10.2
o23: D14.2 D15.1 R1.1 | length 13.6
  Top Layer w0.5: R1.1 122.02,57.25 122.02,56.645 120.85,55.475 120.85,52.675 122.725,50.8 122.725,49.258 123.018,48.965 124.784,48.965 124.95,48.799 124.95,47.295
o31: D21.2 D22.1 R7.1 | length 10.6
  Top Layer w0.5: R7.1 41.875,70.551 41.875,77.192 42.168,77.485 42.946,77.485 D22.1 D21.2@43.15,79.799
o32: D17.2 D18.1 R5.1 | length 24.1
  Top Layer w0.5: R5.1 82.025,70.575 88.475,70.575 89.025,71.125 89.025,78.6 87.901,79.724 86.85,79.724 87.125,79.449 D18.1@87.125,77.645
o33: D12.2 D13.1 R2.1 | length 32.4
  Top Layer w0.5: R2.1 77.168,70.325 76.875,70.032 76.875,66.2 79.15,63.925 79.15,59.243 79.443,58.95 85.307,58.95 85.6,58.657 85.6,50.775 86.451,49.924 86.65,49.924 86.825,49.749 86.825,49.55 87.15,49.225 ; D13.1@87.25,47.82 87.25,49.649
o34: D7.2 D8.1 R3.1 | length 14.2
  Top Layer w0.5: R3.1@42.85,58.455 44.507,58.455 44.8,58.162 44.8,50.121 44.507,49.828 43.379,49.828 43.2,49.649 42.885,49.649 42.885,49.504 42.992,49.47 43.131,49.427 43.3,49.374 D8.1@43.3,48.02
o41: Q1.1 R11.1 R12.1 | length 4.5
  Top Layer w0.7: Q1.1@197.325,69.05 197.325,68.08 197.33,68.076 197.33,67.67 197.505,67.495 R12.1@198.035,67.495 ; R12.1@197.89,67.47 200.255,67.47
o42: Q2.1 R10.1 R16.1 | length 4.6
  Top Layer w0.6: R10.1@204.454,67.789 204.623,67.62 R10.1@205,67.62 ; Q2.1@204.625,68.975 204.625,67.995 R10.1@204.773,67.848 ; R10.1@205,67.611 207.759,67.611 R16.1@207.8,67.57
o43: Q3.1 R8.1 R20.1 | length 5.8
  Top Layer w0.6: R8.1@211.8,67.795 211.8,69 Q3.1@211.9,69.1 ; R8.1@212.025,67.57 R8.1@212.35,67.57 ; R8.1@212.475,67.745 212.2,67.47 212.475,67.47 R20.1@215.979,67.47
o44: Q4.1 R9.1 R22.1 | length 5.1
  Top Layer w0.6: Q4.1@219.375,69 219.382,68.993 R9.1@219.382,67.87 ; R9.1@219.525,67.545 R9.1@219.85,67.545 ; R9.1@219.625,67.725 R9.1@219.962,67.725 ; R9.1@219.85,67.725 R22.1@223.159,67.725
of1: K1.4 T1.5 | length 7.5
  Top Layer w2.5: T1.5 199.55,46.294 199.55,51.825 K1.4
of2: K2.4 T1.4 | length 7.6
  Top Layer w2.5: T1.4 206.269,51.219 K2.4
of3: K3.4 T1.3 | length 7.3
  Top Layer w2.5: T1.3@213.625,46.225 213.625,46.985 214.675,48.035 214.675,52.25 K3.4
of4: K4.4 T1.2 | length 7.3
  Top Layer w2.5: T1.2@220.919,46.331 220.832,46.418 220.832,46.983 221.8,47.952 221.8,52 K4.4
RF: P5.2 P5.3 U1.4 | length 89.5
  Top Layer w0.5: U1.4@113.45,72.685 111.735,72.685 111.425,72.375 111.425,41.95 112.325,41.05 158,41.05 158.775,41.825 158.775,45.474 158.424,45.825 155.825,45.825 P5.2@155.819,45.825 ; P5.2@155.825,45.949 P5.3@155.825,48.034
RF2: P4.2 P4.3 U2.4 | length 10.1
  Top Layer w0.5: U2.4@57.375,62.202 57.375,60.968 57.668,60.675 61.492,60.675 61.785,60.968 61.785,62.6 P4.3@64.325,62.6
VCC: C6.1 C8.1 C9.1 C12.2 D6.1 P1.2 P2.2 P3.4 P4.4 P5.4 R13.2 R14.2 R15.2 R17.2 R18.2 R19.2 R21.2 R23.1 R23.2 U1.1 U2.1 U4.3 U5.3 U7.1 | length 385.3
  Top Layer w0.5: R21.2@42.825,85.087 41.387,85.087 40.875,84.575 40.875,66.25 ; R21.2 43.05,85.087 42.825,85.312 42.825,88.807 43.118,89.1 86.175,89.1 87.075,88.2 R18.2 ; R13.2 40.887,55.287 40.875,55.275 ; P2.2@44.375,66.25 40.875,66.25 ; U2.1@53.539,62.412 53.566,62.385 53.566,61.679 53.525,61.638 53.525,59.475 ; P4.4@66.865,62.6 66.865,64.78 67.14,65.055 C8.1@67.175,65.055 ; C8.1@67.24,64.99 70.785,64.99 71.941,63.834 71.941,62.192 71.979,62.154 71.979,61.735 72,61.714 72,59.068 71.707,58.775 54.225,58.775 53.525,59.475 ; R18.2@86.75,85.487 R18.2@86.75,85.525 ; R15.2@87.325,55.412 88.682,55.412 88.975,55.119 88.975,41.225 88.5,40.75 41.168,40.75 40.875,41.043 40.875,55.275 ; C9.1 113.355,76.576 113.401,76.53 U1.1 115.582,76.53 115.875,76.237 115.875,72.075 114.65,70.85 112.968,70.85 112.675,70.557 112.675,65.275 ; C9.1@113.38,81.5 113.315,81.565 113.315,85.36 113.224,85.45 113.224,87.799 113.804,88.379 119.15,88.379 ; 116.246,65.275 115.974,65.275 112.675,65.275 ; R19.2@119.15,85.683 119.15,88.379 ; R17.2@119.595,54.2 112.968,54.2 112.675,54.493 112.675,65.275 ; C6.1 151.67,66.375 151.395,66.1 151.218,66.1 150.925,65.807 150.925,51.675 151.711,50.889 P5.4@156.086,50.889 ; C6.1@151.67,67.025 152.799,68.154 152.799,72.234 153.15,72.585 U4.3 ; U4.3@155.2,72.525 156.849,72.525 157.2,72.876 157.2,75.374 156.374,76.2 151.175,76.2 150.691,76.684 150.691,79.184 150.986,79.479 156.829,79.479 157.925,80.575 157.925,87 156.546,88.379 119.15,88.379 ; 40.875,55.275 40.875,59.65 ; 40.875,59.65 40.875,66.25 ; 40.875,59.65 53.15,59.65 53.25,59.75 53.525,59.475
  Top Layer w0.6: R23.2@189.25,74.65 C12.2@189.25,77.1
  Top Layer w0.7: R23.1 189.575,71.855 189.75,71.68 189.75,71.355 190.925,70.18 P3.4 ; C12.2 189.533,77.008 189.533,78.733 D6.1 191.675,80.875 U7.1
pads on no net: P1.1 P4.5 P5.5 U1.3 U4.5 U4.6 U4.7 U4.8 U5.5 U5.6 U5.7 U5.8
copper on no net: | length 277.2
  Top Layer w0.5: 54.275,79.325 56.525,79.325 62.7,73.15 64.045,73.15 66.395,70.8 69.577,70.8 69.901,70.476 69.901,69.459 69.95,69.409 ; 59.398,53.473 62.875,56.95 63.779,57.854 63.885,57.854 73.779,57.854 75.325,59.4 75.325,63.45 72.425,66.35 72.425,68.519 72.441,68.535 72.441,69.916 72.425,69.931 ; 71.2,68.897 71.2,76.86 73.515,79.175 75.602,79.175 ; 73.775,69.878 73.749,69.853 73.749,68.535 73.775,68.509 73.775,66.5 76.725,63.55 76.725,52.212 74.625,50.112 ; 136.7,81.725 141.65,76.775 144.3,76.775 145.375,75.7 145.375,75.65 147.17,73.855 149.05,73.855 ; 136.762,65.1 143.312,71.65 145.75,71.65 146.7,72.6 146.797,72.6 148.5,72.6 ; 136.875,48.55 137.15,48.275 146.724,48.275 147.075,48.626 147.075,70.7 147.69,71.315 149.05,71.315
  Top Layer w0.6: 81.822,68.55 87.975,68.55 88.526,67.999 88.526,67.501 88.175,67.15 81.326,67.15 80.975,66.799 80.975,66.226 81.326,65.875 88.125,65.875 88.476,65.524 88.476,65.026 88.1,64.65 81.326,64.65 80.975,64.299 80.975,60.726 81.326,60.375 87.999,60.375 88.35,60.726 88.35,62.25 88.075,62.525 85.575,62.525 ; 155.525,66.525 155.158,66.158 153.983,66.158 152.425,64.6 152.425,53.8 153,53.225 153.524,53.225 153.875,53.576 153.875,63.974 154.226,64.325 154.849,64.325 155.2,63.974 155.2,53.576 155.551,53.225 156.074,53.225 156.425,53.576 156.425,63.924 156.776,64.275 157.349,64.275 157.7,63.924 157.7,53.625 158.025,53.3 158.699,53.3 159.05,53.651 159.05,68.026

## Keep-outs
Keep-Out Layer:
  lines w1: 0,-0.381 0,347.3 263.225,347.3 263.225,0 0,0

## Other copper
Top Layer:
  rectangle: 65.575,43.025 83.675,57.2
  rectangle: 46.025,43.1 63.125,57.2
  rectangle: 65.8,72.675 84.254,86.975
  rectangle: 46.025,72.9 63.275,87.15
  region: 127.725,87.475 127.725,74.4 145.675,74.4 145.675,87.475
  region: 127.775,71.95 127.775,58.25 145.75,58.25 145.75,71.95
  region: 127.85,55.95 127.85,42.85 145.9,42.85 145.9,55.95
  region net GND: 149.025,50.975 150.725,49.275 152.975,49.275 153.475,48.775 153.45,48.75 153.45,42.175 153.2,41.925 153.075,42.05 147.3,42.05 147.3,46.65 149.025,48.375 149.025,49.3
  region net GND: 149.675,75.825 147.75,75.825 147.25,76.325 147.25,86.75 148.075,87.575 155.35,87.575 157,85.925 157,81.3 156.1,80.4 156.025,80.475 149.75,80.475 148.775,79.5 148.825,79.45 148.825,78.075
  region net faz: 199.325,60.425 190.45,51.55 192.212,49.787 199.4,56.975 222.275,56.975 226.025,56.975 226.025,57.475 223.05,60.45 222.4,60.45
  region net faz: 186.995,54.35 186.995,46.755 192.155,41.595 193.726,41.595 194.475,42.344 194.475,53.825 193.95,54.35
  region net of3: 210.617,49.917 210.617,42.23 211.252,41.595 215.189,41.595 215.951,42.357 215.951,53.475 214.175,53.475
  region net of4: 219.761,41.595 219.888,41.722 219.761,41.595 218.11,41.595 217.602,42.103 217.602,50.053 221.282,53.225 223.063,53.225 223.063,42.738 221.92,41.595 218.745,41.595
  region net nol: 227.195,41.595 232.08,46.48 232.08,51.22 231.475,51.825 229.375,51.825 225.095,47.545 225.095,41.849 225.349,41.595
  region net of1: 196.647,50.903 196.647,42.23 197.282,41.595 201.219,41.595 201.775,42.151 201.775,52.975 198.967,52.975
  region net of2: 203.747,50.672 203.747,42.355 204.382,41.72 208.319,41.72 208.875,42.276 208.875,53.1 206.466,53.1
  region net o23: 122.35,52.625 113.925,52.625 112.8,51.5 112.8,43.5 114.275,42.025 122.025,42.025 122.975,42.975 122.975,52
  pour cut-out: 147.523,73.6 126.316,73.6 126.316,89.289 147.384,89.289
  pour cut-out: 147.666,57.475 126.443,57.475 126.443,72.825 147.53,72.825
  pour cut-out: 147.741,40.775 126.443,40.775 126.443,56.725 147.6,56.725

## Silkscreen, mask and mechanical layers (free items; w line width, h text height)
Top Overlay:
  drawing of 48 lines, arcs and shapes, not listed
Bottom Overlay:
  drawing of 44 lines, arcs and shapes, not listed
Top Paste:
  region: 191.663,66.587 191.663,68.063 191.438,68.288 190.388,68.288 190.188,68.088 190.188,66.613
  region: 193.587,66.563 193.587,68.038 193.362,68.263 192.312,68.263 192.112,68.063 192.112,66.588
  region: 188.241,63.931 188.241,62.456 188.466,62.231 189.516,62.231 189.716,62.431 189.716,63.906
  region: 190.179,63.919 190.179,62.444 190.404,62.219 191.454,62.219 191.654,62.419 191.654,63.894
  region: 192.129,63.919 192.129,62.444 192.354,62.219 193.404,62.219 193.604,62.419 193.604,63.894
  region: 189.713,66.637 189.713,68.113 189.488,68.338 188.438,68.338 188.238,68.138 188.238,66.663
Mechanical 2:
  lines w0.2: 40.125,40.17 40.125,89.85 ; 40.125,89.875 89.9,89.875 89.9,40.12 40.177,40.084 ; 186.36,84.11 191.5,89.25 ; 110.16,40.148 110.16,89.95 159.9,89.95 159.9,40.184 110.16,40.148
  lines w0.254: 186.36,84.11 186.36,46.665 192.192,40.833 227.583,40.833 232.715,45.965 232.715,84.04 ; 191.5,89.25 227.5,89.25 232.713,84.038

## Text inside footprints (layer, text, board x,y; h text height)
P1: Top Overlay "1" at 118.722,60.703 h1.27 r90; Top Overlay "2" at 116.182,60.195 h1.27 r90; Top Overlay "5" at 118.722,69.339 h1.27 r90; Top Overlay "6" at 116.182,69.339 h1.27 r90
P2: Top Overlay "6" at 50.439,65.917 h1.27; Top Overlay "5" at 50.439,63.377 h1.27; Top Overlay "2" at 41.436,66.013 h1.27; Top Overlay "1" at 41.611,63.388 h1.27
P3: Top Overlay "1" at 186.353,63.502 h1.27; Top Overlay "2" at 185.845,66.042 h1.27; Top Overlay "5" at 194.989,63.502 h1.27; Top Overlay "6" at 194.989,66.042 h1.27
U3: Top Overlay "+" at 230.915,58.149 h0.81 r270; Top Overlay "-" at 228.625,58.15 h0.81 r270